# EAGLE board accessControl (EAGLE 9.6.2)
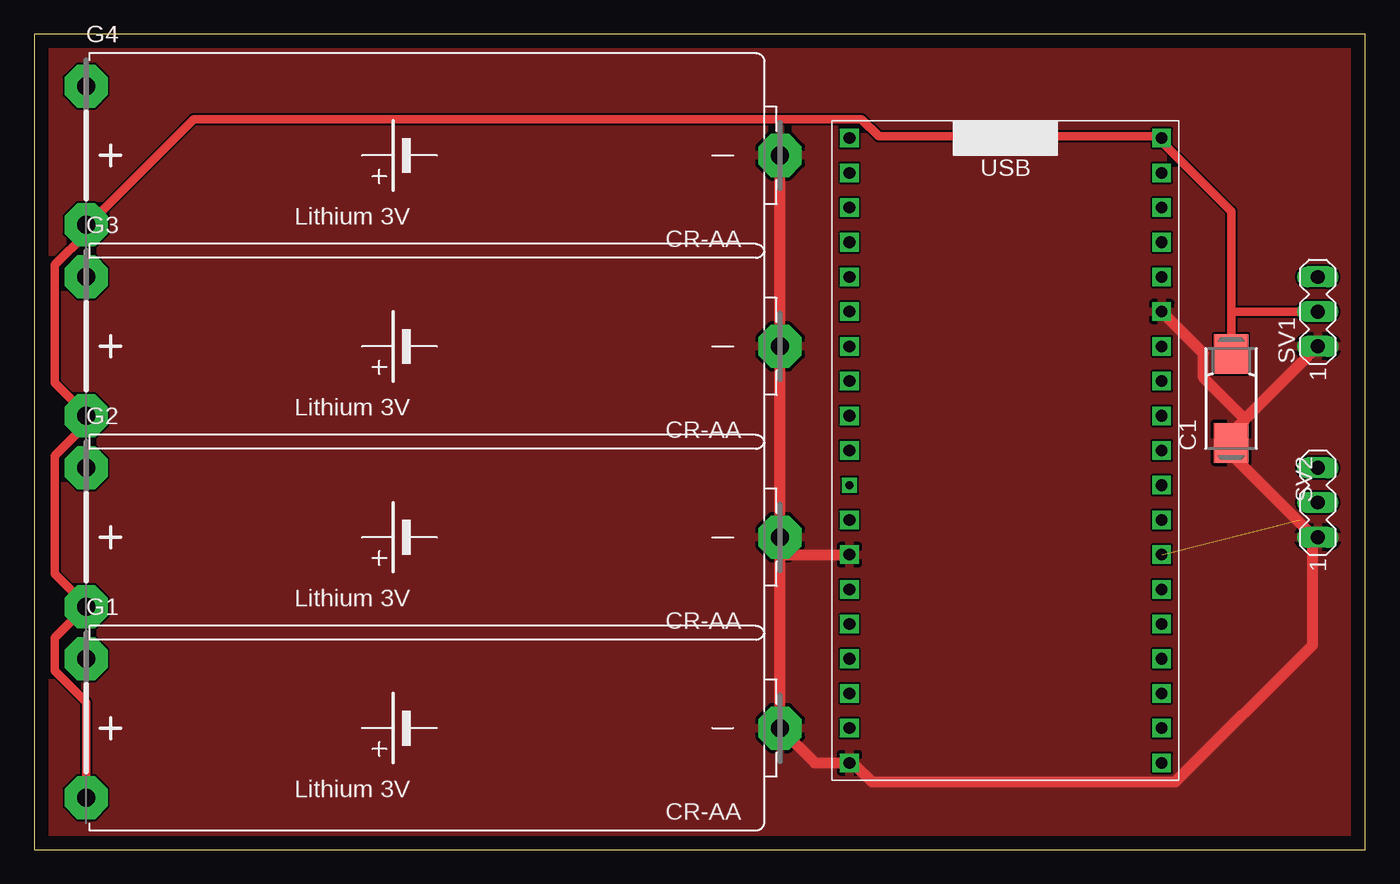
[diagram p0: board, top side]
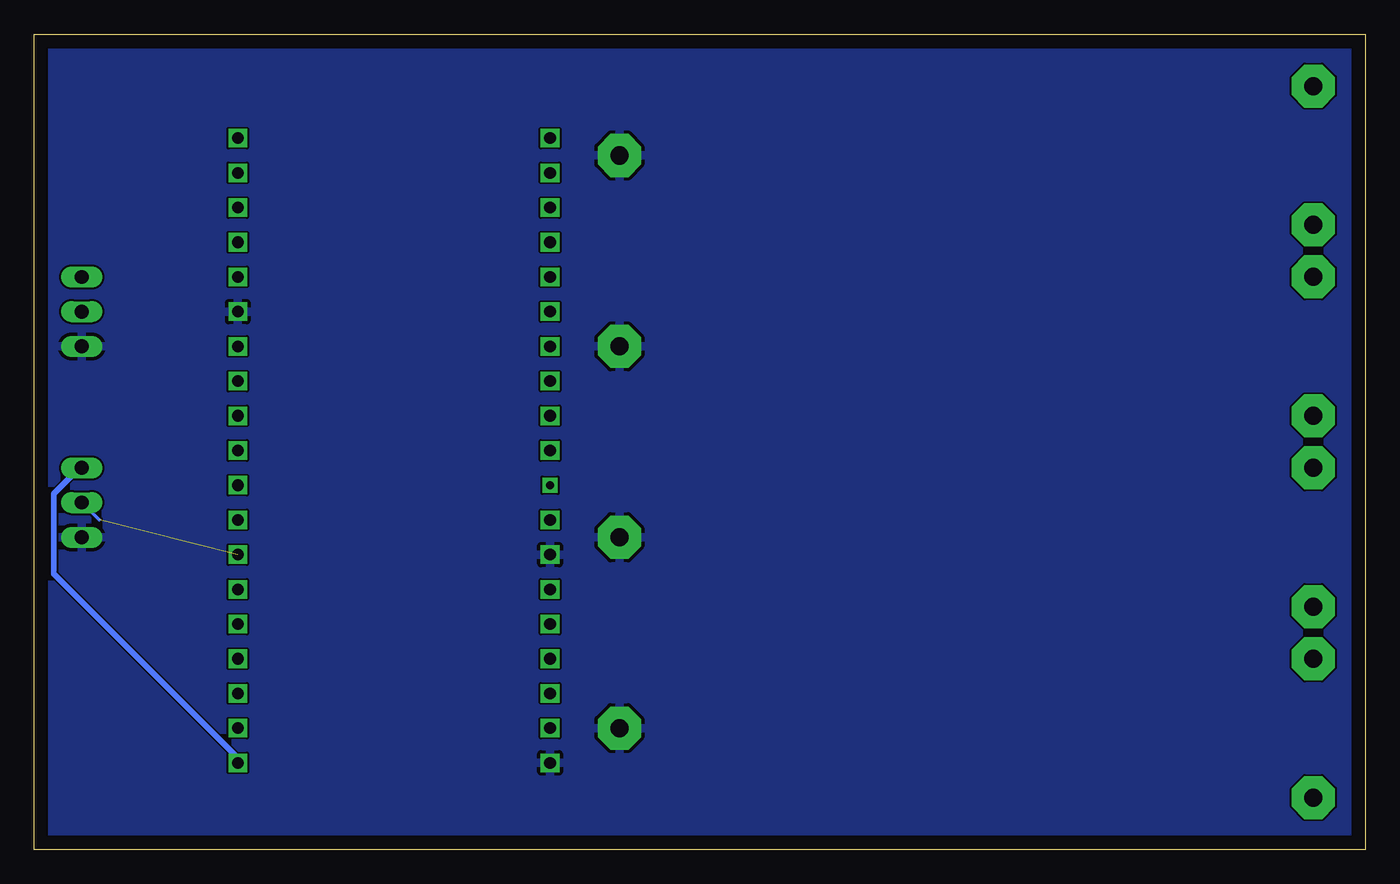
[diagram p1: board, bottom side, seen from below]

Size 97.46 x 59.68 mm. Coordinates in mm from the lower left corner, seen from the top.
Outline: 0,0 97.46,0 97.46,59.68 0,59.68 0,0
Copper layers (1*16): Top 0.035mm / dielectric 1.5mm / Bottom 0.035mm
Design rules "default": minimum track width 6mil, minimum drill 0.35mm, track to track 6mil, track to pad 6mil, pad to pad 6mil, via to via 6mil, smd to smd 6mil, copper to edge 40mil, drill to drill 6mil, minimum pad ring 10mil, minimum via ring 8mil, stop-mask expansion 4mil, vias tented up to drill 0mil, thermal gap 10mil
Net classes: 0 signal: width 0.254 mm, clearance 0.254 mm; 1 5V: width 0.61 mm, clearance 0.305 mm; 3 3v3: width 0.406 mm, clearance 0.305 mm; 4 GND: width 0.813 mm

## Footprints (pad centres in the part's own frame; a part is rotated, then mirrored left to right if it is on the bottom)
085CS_1AR = smd 2.9 x 2.5: + 3.25,0; - -3.25,0
CRAA = drill 1.321 pad 3.15 octagon: + -25.4,-5.08; +@1 -25.4,5.08; - 25.4,0
MA03-1 = drill 1.016 long: 1 -2.54,0; 2 0,0; 3 2.54,0
ESP32 = drill 0.85 square: 3.3V 1.27,46.99; 5V 1.27,1.27; EN 1.27,44.45; GND1 1.27,13.97; GND2 24.13,46.99; GND3 24.13,31.75; GPIO0 24.13,13.97; GPIO2 24.13,11.43; GPIO4 24.13,16.51; GPIO5 24.13,24.13; GPIO6 24.13,1.27; GPIO7 24.13,3.81; GPIO8 24.13,6.35; GPIO9 1.27,8.89; GPIO10 1.27,6.35; GPIO11 1.27,3.81; GPIO12 1.27,16.51; GPIO13 1.27,11.43; GPIO14 1.27,19.05; GPIO15 24.13,8.89; GPIO16 24.13,19.05; GPIO17 24.13,21.59; GPIO19 24.13,29.21; GPIO21 24.13,34.29; GPIO22 24.13,41.91; GPIO23 24.13,44.45; GPIO25 1.27,26.67; GPIO26 1.27,24.13; GPIO27 1.27,21.59; GPIO32 1.27,31.75; GPIO33 1.27,29.21; GPIO34 1.27,36.83; GPIO35 1.27,34.29; GPIO36 1.27,41.91; GPIO39 1.27,39.37; RX 24.13,36.83; TX 24.13,39.37 | drill 0.6 square: GPIO18 24.13,26.67

## Placement (x,y rotation side)
C1  470uF  [085CS_1AR]  87.63,33.02 90 top
G1  CR-AA  [CRAA]  29.21,8.89 0 top
G2  CR-AA  [CRAA]  29.21,22.86 0 top
G3  CR-AA  [CRAA]  29.21,36.83 0 top
G4  CR-AA  [CRAA]  29.21,50.8 0 top
SV1  [MA03-1]  93.98,39.37 90 top
SV2  [MA03-1]  93.98,25.4 90 top
U$1  ESP32  [ESP32]  83.82,53.34 180 top

## Library data of the parts
C1 = rcl; SPICEPREFIX: C
G1-G4 = battery
SV1 SV2 = con-lstb; OC_FARNELL: unknown; OC_NEWARK: unknown
U$1 = ESP32

## Nets
+3V3 [3v3]: SV2.3 U$1.3.3V
+5V [5V]: C1.+ G1.+ G2.+ G3.+ G4.+ SV1.2 U$1.5V
GND [GND]: C1.- G1.- G2.- G3.- G4.- SV1.1 SV2.1 U$1.GND1 U$1.GND2 U$1.GND3
N$1: SV2.2 U$1.GPIO32
N$2: U$1.GPIO25
N$3: SV1.3

## Tracks (layer width: path | path; a pad name or v marks a point on that pad's centre or on a via)
+3V3
  Bottom 0.406: U$1.3.3V 82.55,6.73 96.01,20.19 96.01,26.03 94.11,27.94 SV2.3
+5V
  Top 0.61: C1.+ 87.63,39.37 | 87.63,39.37 87.63,46.74 82.55,51.82 U$1.5V 82.3,52.2 61.85,52.2 60.58,53.47 11.68,53.47 4.06,45.85 G4.+ 3.81,45.09 1.52,42.8 1.52,34.16 3.68,32 G3.+ 3.81,31.12 1.52,28.83 1.52,20.19 3.68,18.03 G2.+ 1.52,15.49 1.52,13.08 3.81,10.79 G1.+ | 87.63,39.37 SV1.2
GND
  Top 0.813: SV1.1 88.65,31.5 | 88.65,31.5 87.63,30.48 C1.- 87.88,29.46 87.88,28.7 93.73,22.86 SV2.1 93.6,22.48 93.6,14.99 83.57,4.95 61.34,4.95 60.07,6.22 U$1.GND2 57.15,6.35 G1.- G2.- | G2.- G3.- G4.- | U$1.GND3 54.99,21.59 G2.- | U$1.GND1 85.6,36.32 85.6,34.54 88.65,31.5
  pour Top: 0,59.69 0,0 97.79,0 97.79,59.69
  pour Bottom: 0,59.69 0,0 97.79,0 97.79,59.69
N$1  (1 unrouted)
  Bottom 0.254: SV2.2 92.71,24.13